# Altium PCB CirclePCBV2_3in.PcbDoc
Units mil, origin at the board's own origin, x right, y up, seen from the top; angles counter-clockwise.
Board outline 3370.9 x 3599.81 mil, 4 copper layers (Top Layer, GND Plane, 5V Plane, Bottom Layer), stack 38.58 mil thick; 9 components, 31 nets, 90 pads, 33 vias.
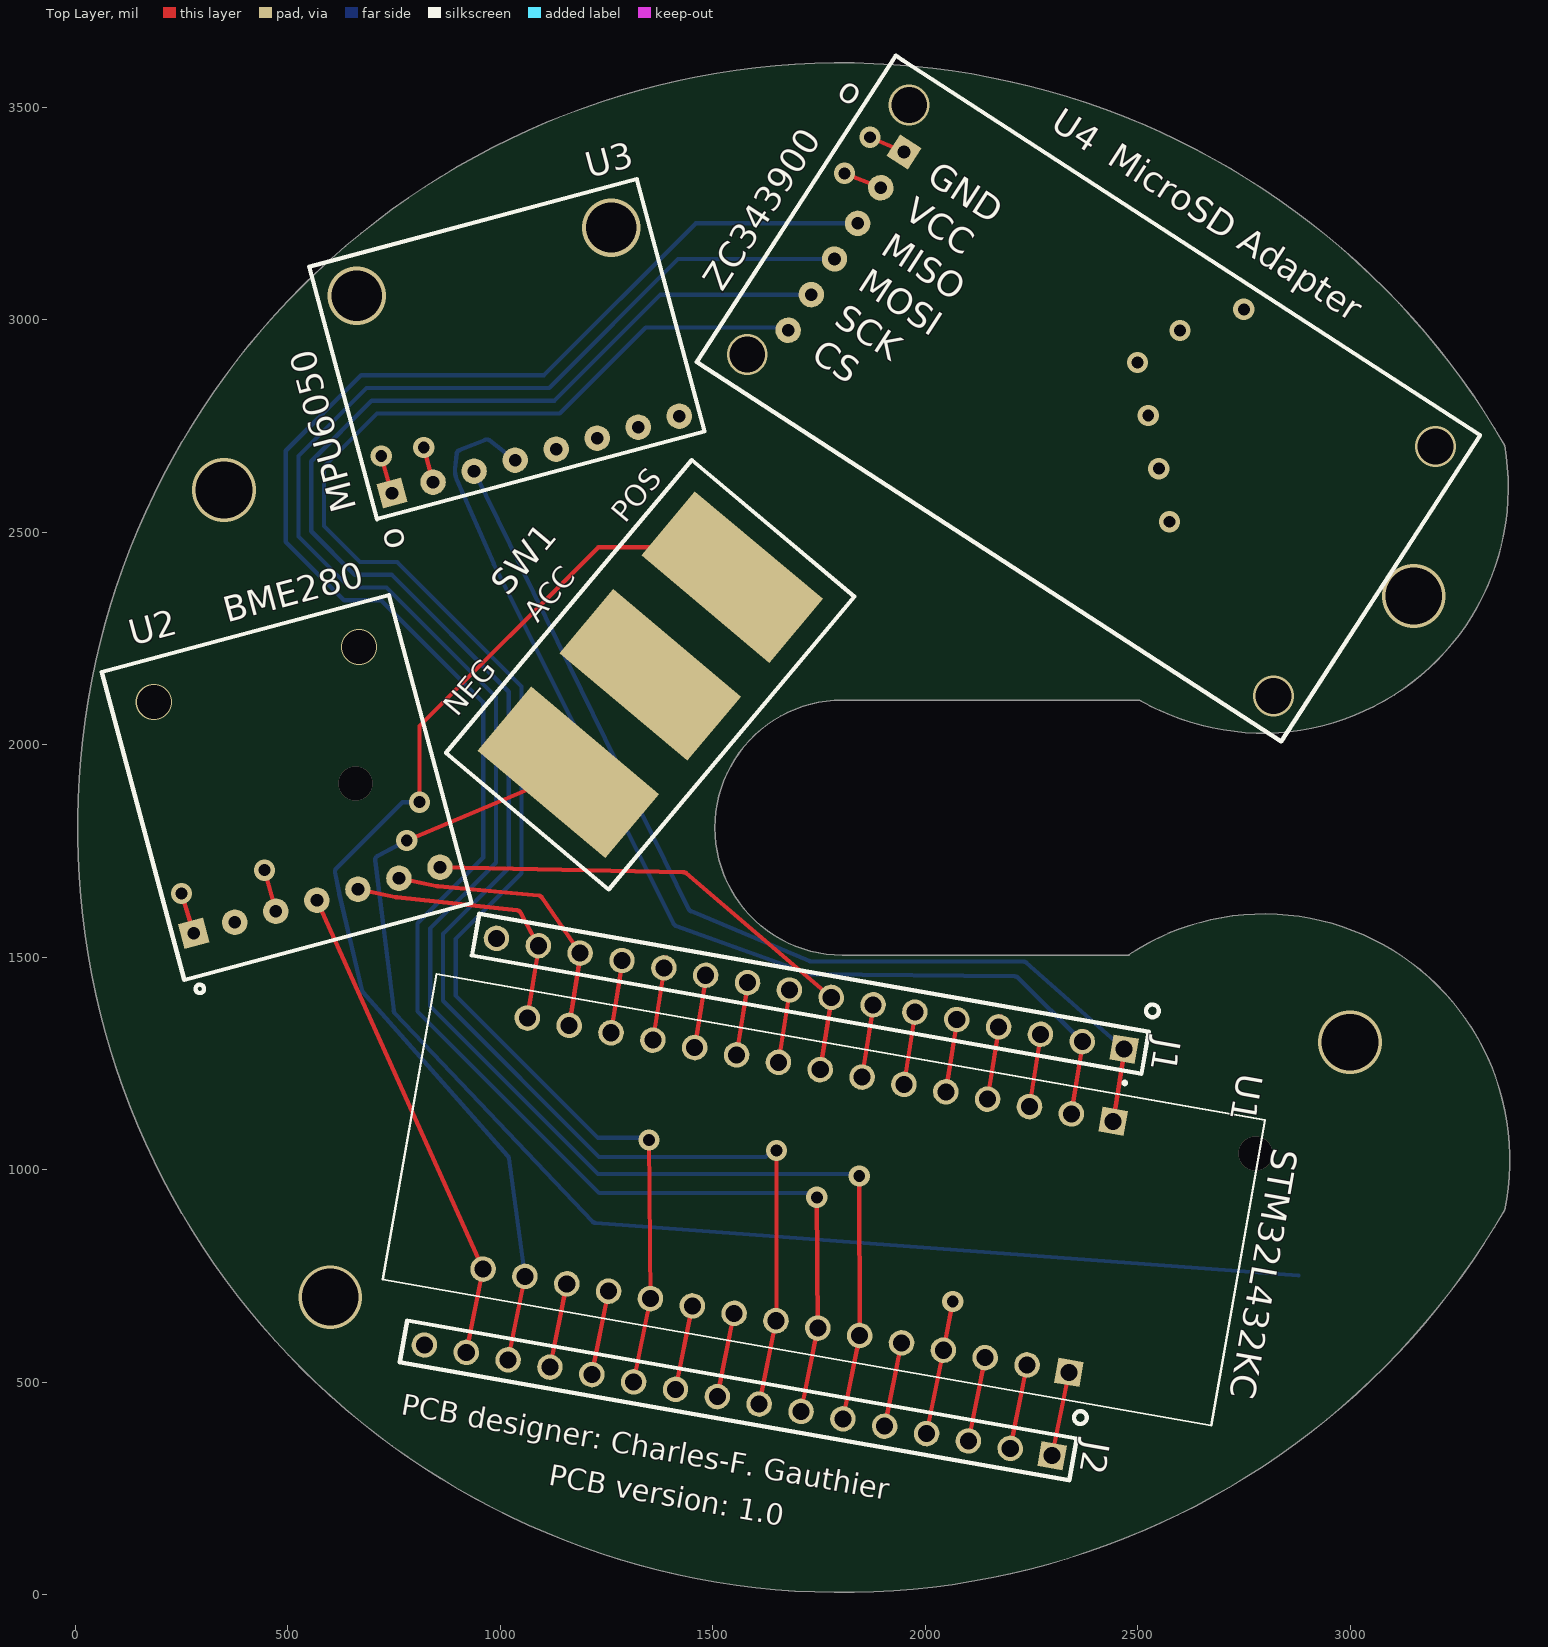
[diagram p0: Top Layer view]
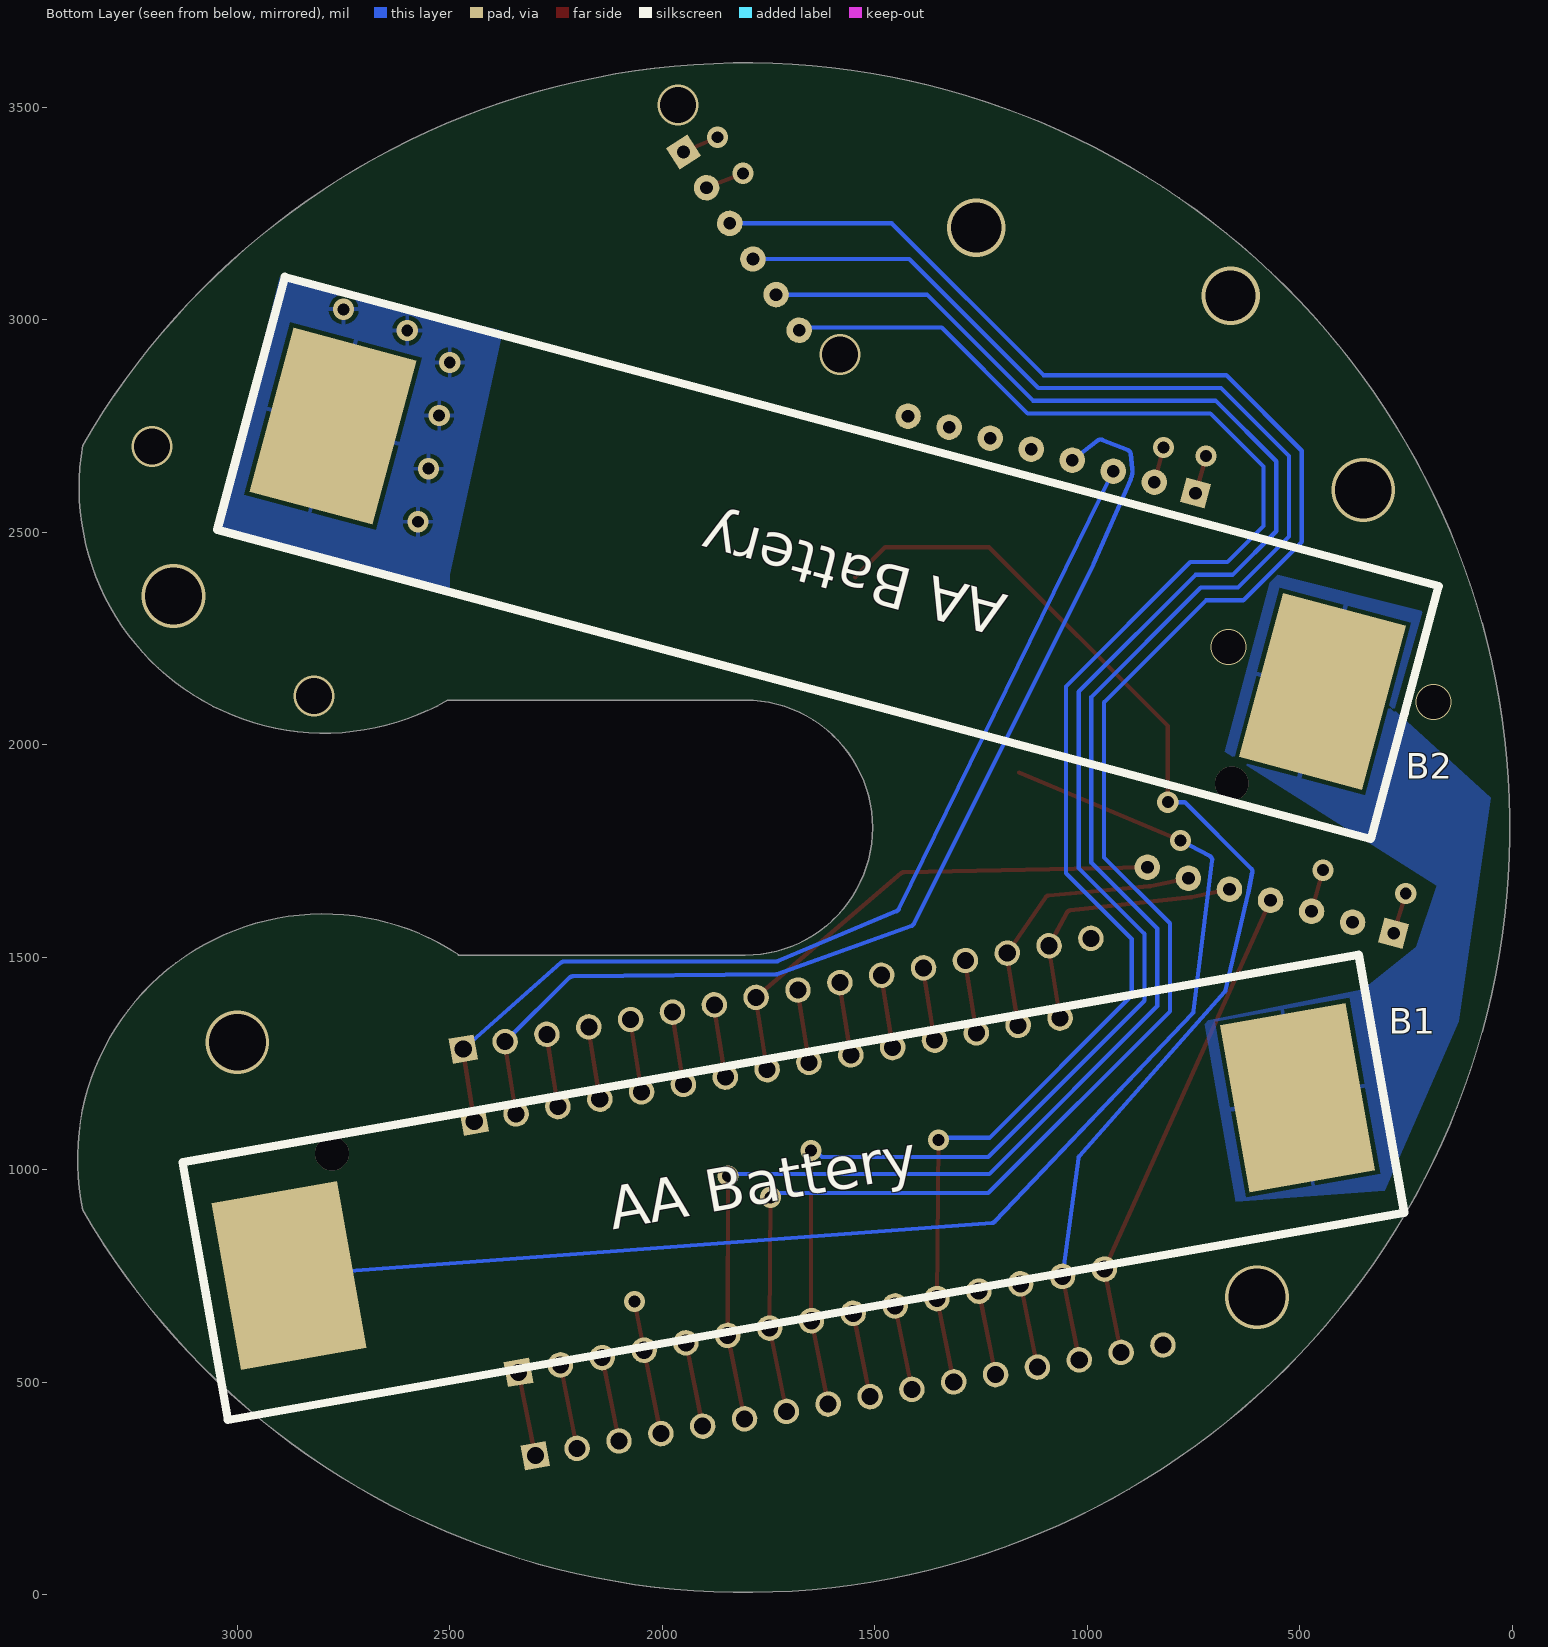
[diagram p1: Bottom Layer view, seen from below]
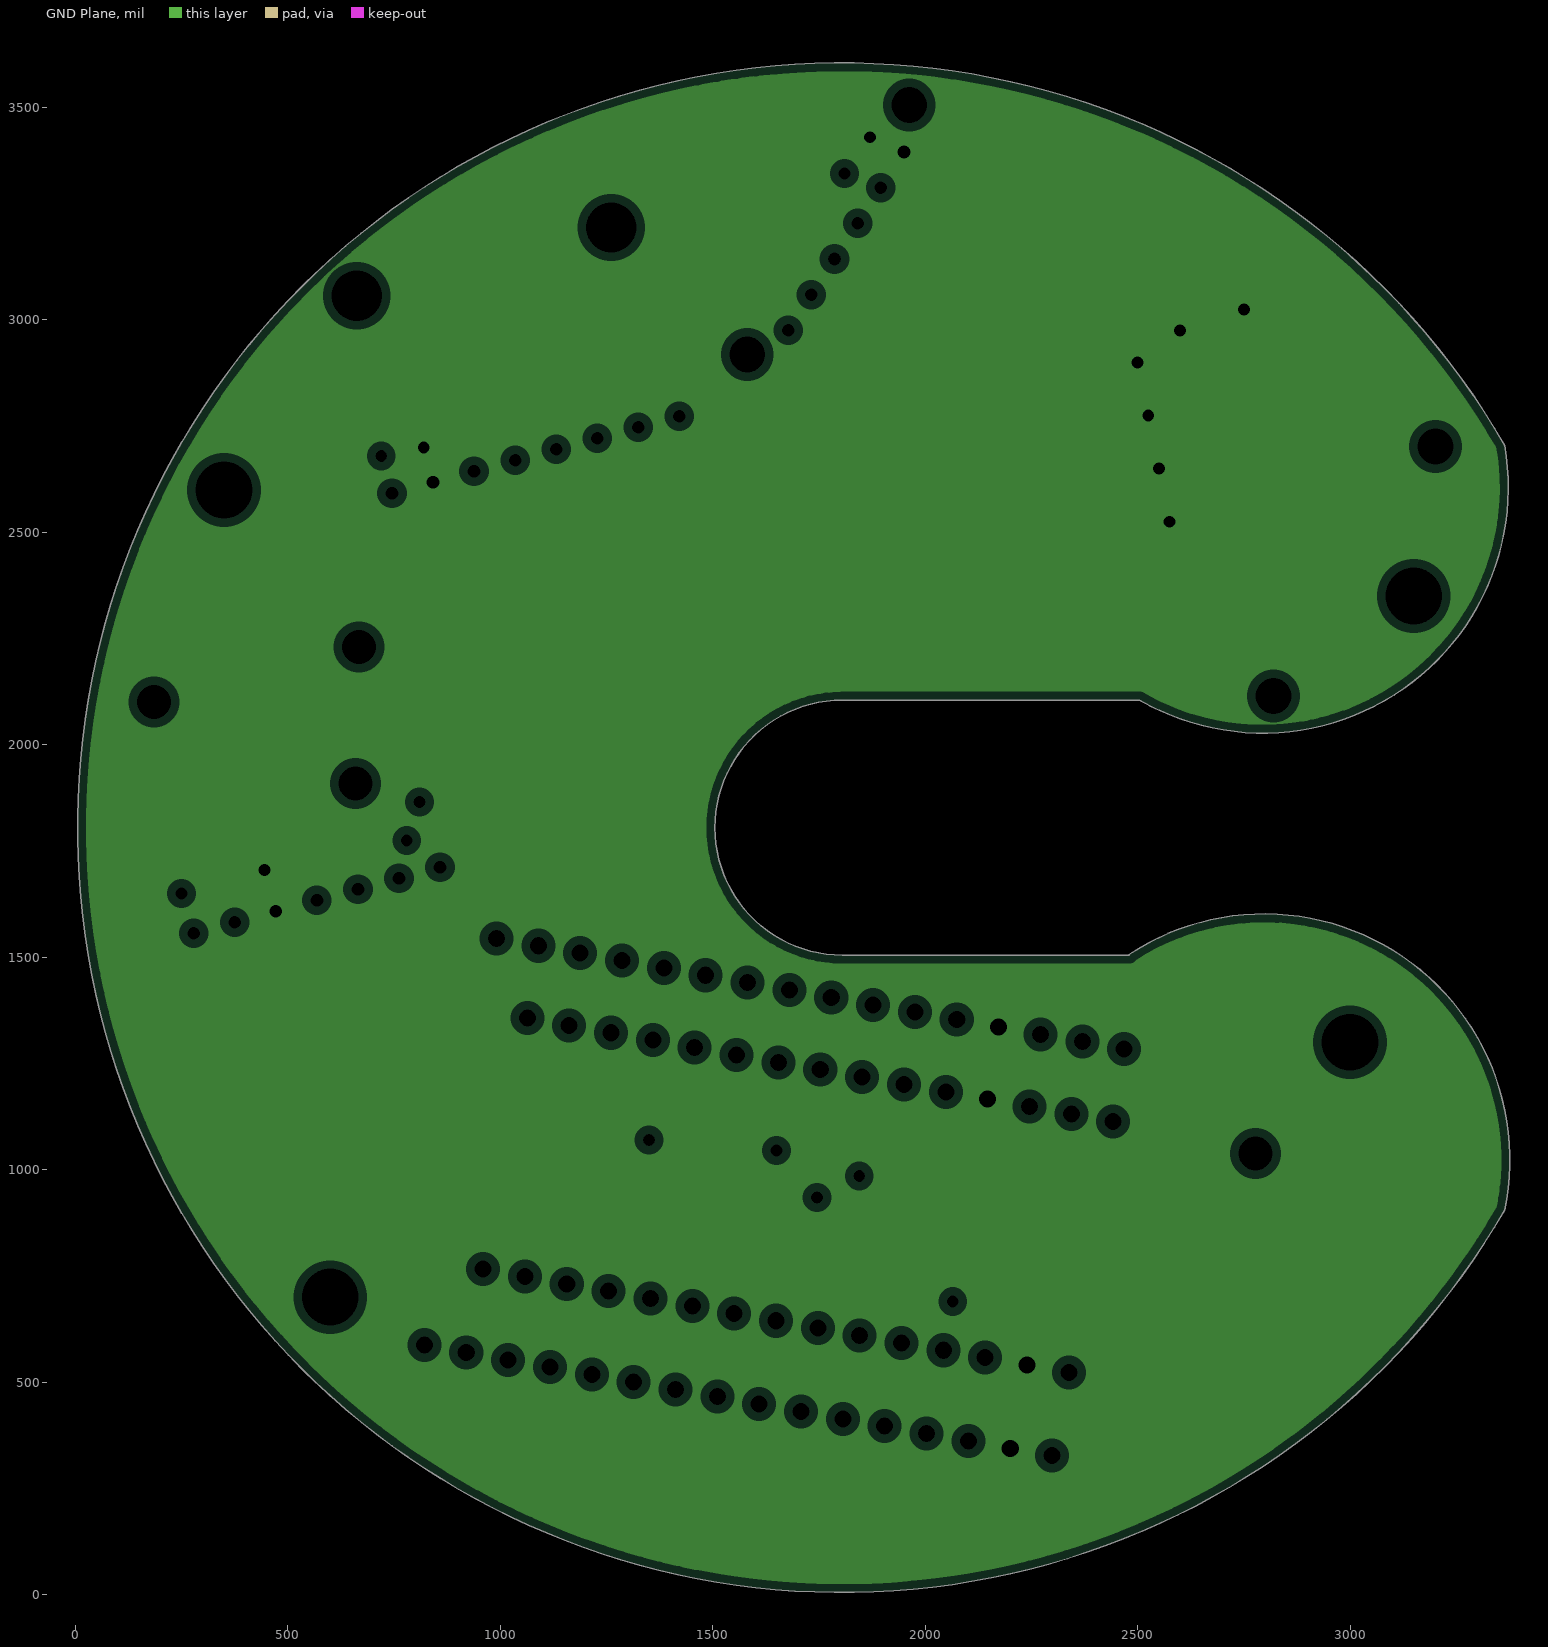
[diagram p2: GND Plane, clearances drawn from the general rule]
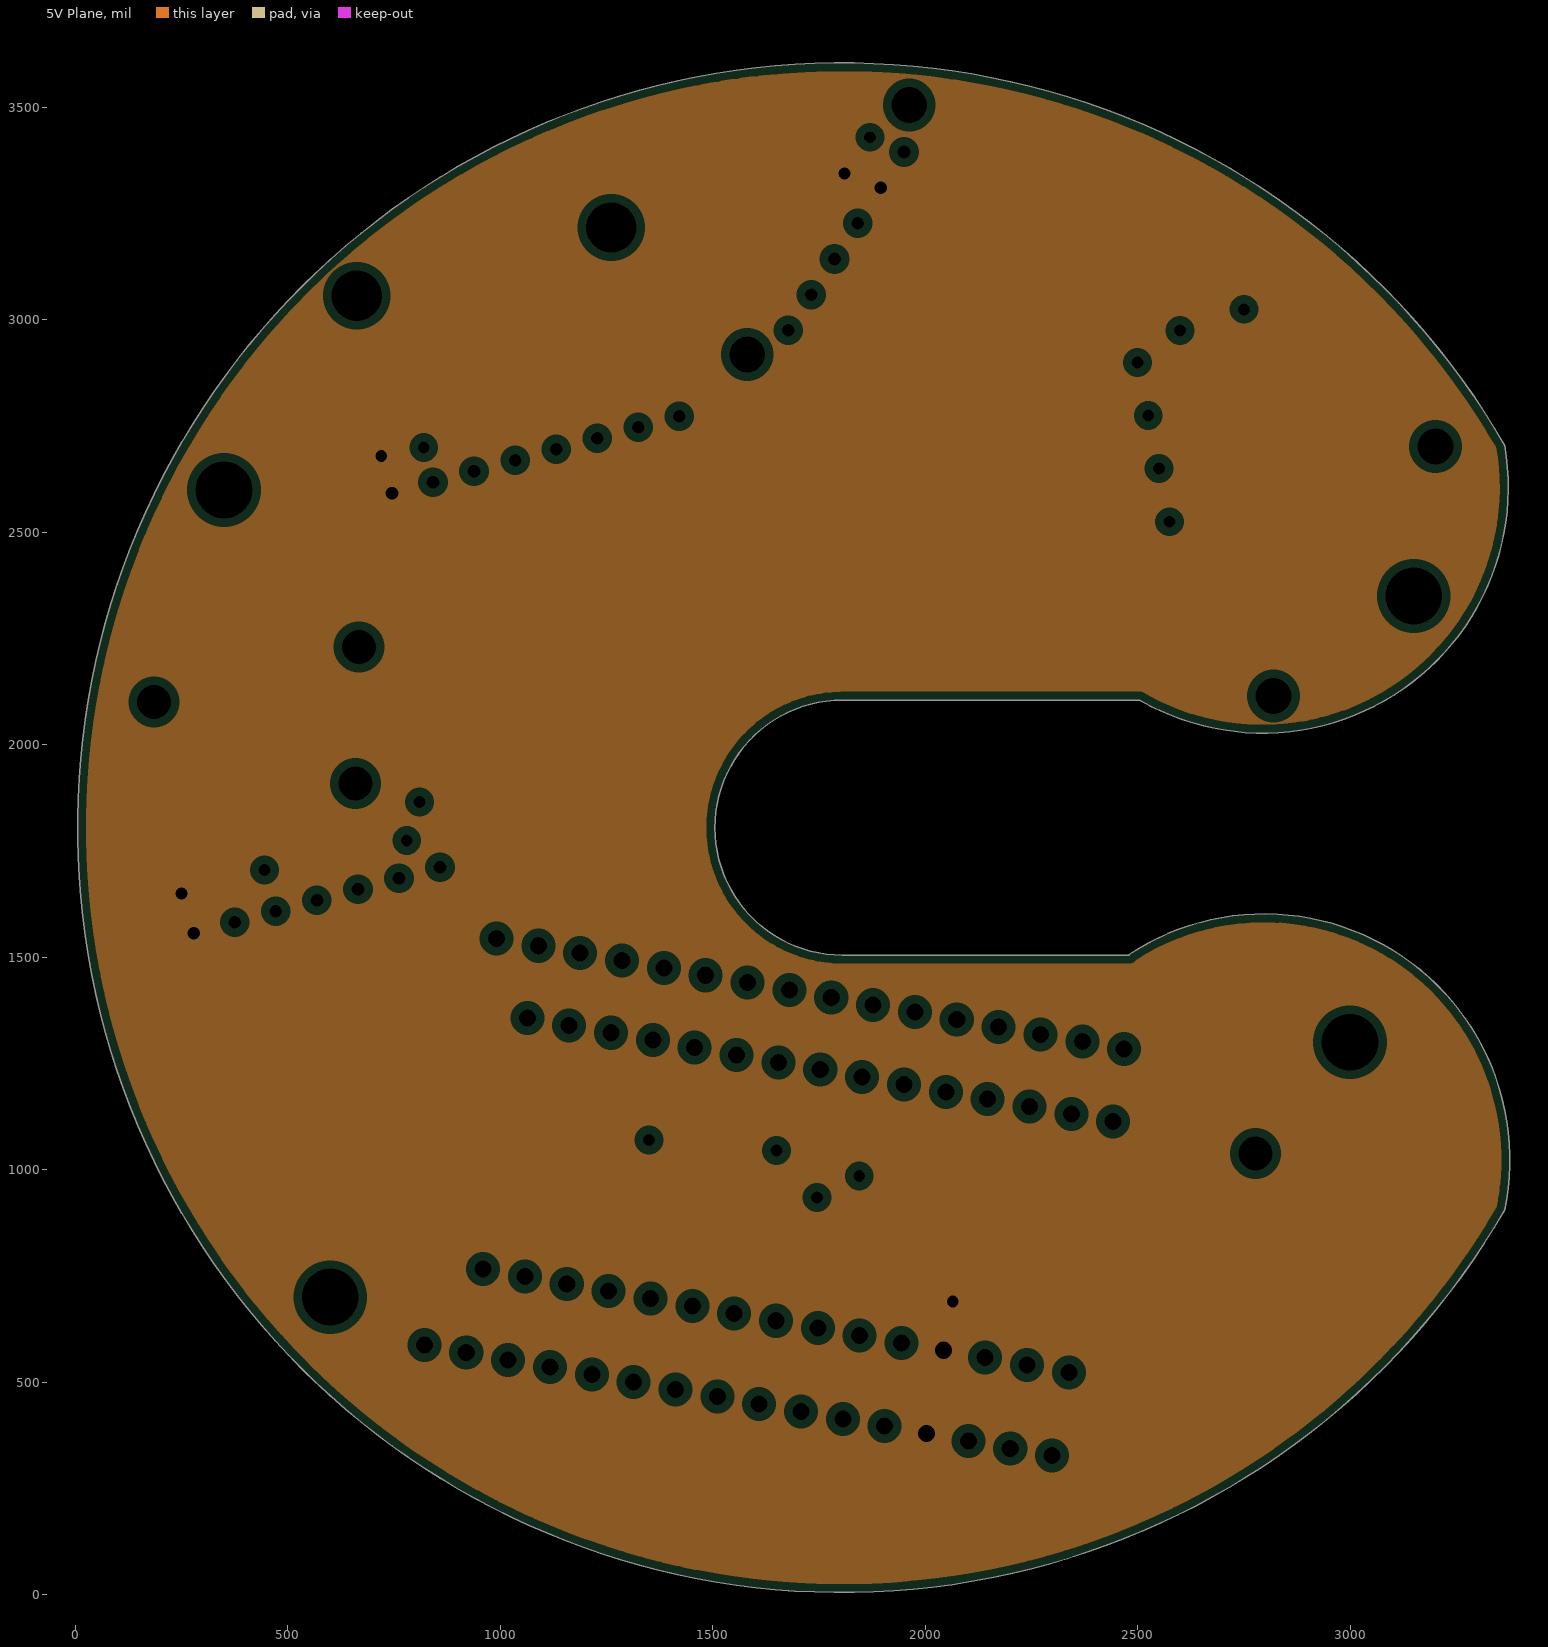
[diagram p3: 5V Plane, clearances drawn from the general rule]

## Layer stack, top to bottom
Top Solder: solder mask 0.4, Solder Resist, Dk 3.5
Top Layer: signal copper 1.4
Dielectric 2: prepreg 10.19, PP-006, Dk 4.1
GND Plane: plane copper 1.4, net GND
Dielectric 1: dielectric 12.6, FR-4, Dk 4.8
5V Plane: plane copper 1.4, net 5V
Dielectric 3: prepreg 10.19, PP-006, Dk 4.1
Bottom Layer: signal copper 1.4
Bottom Solder: solder mask 0.4, Solder Resist, Dk 3.5

## Board outline
3363.85,905 cw(c1805,1805) 3363.85,2705 cw(c2794.13,2605.82) 2505,2105 1805,2105 ccw(c1805,1805) 1805,1505 2480.49,1505 2479.51,1506.49 cw(c2797.88,1023.73)

## Design rules (kind name [scope] priority, off if disabled: settings)
Clearance [All] p1: gap=10 ignorepadtopadclearanceinfootprint=FALSE except(0: Arc-Hole Track-Hole SMDPad-Hole THPad-Hole Via-Hole Fill-Hole Poly-Hole Region-Hole Text-Hole)
HoleSize [All] p1: absolutevalues=TRUE maxlimit=150 minlimit=1 maxpercent=80.000 minpercent=20.000
PlaneClearance [All] p1: clearance=20
PlaneConnect [All] p1: planeconnectstyle=Relief reliefexpansion=20 reliefentries=4 reliefconductorwidth=10 reliefairgap=10
PolygonConnect [All] p1: connectstyle=Relief reliefconductorwidth=10 reliefentries=4 polygonreliefangle="90 Angle" airgapwidth=10
RoomDefinition STM32 [InComponentClass('STM32')] p1: confinementstyle=ConfineOut formatcopy=TRUE lockcomponents=FALSE outline 7280,6095 8515,6095 8515,8290 7280,8290
RoomDefinition Sensors [InComponentClass('Sensors')] p2: confinementstyle=ConfineOut formatcopy=TRUE lockcomponents=FALSE outline 7200,4740 8680,4740 8680,5765 7200,5765
RoomDefinition SD [InComponentClass('SD')] p3: confinementstyle=ConfineOut formatcopy=TRUE lockcomponents=FALSE outline 7170,2678.62 8300,2678.62 8300,4523.62 7170,4523.62
RoomDefinition Power [InComponentClass('Power')] p4: confinementstyle=ConfineOut formatcopy=TRUE lockcomponents=FALSE outline 7205,-395 9225,-395 9225,2550 7205,2550
RoutingVias [All] p1: holewidth=28 width=50 viastyle="Through Hole" minholewidth=28 minwidth=50 maxholewidth=28 maxwidth=50
SilkToSolderMaskClearance [IsPad] p1 off: minsilkscreentomaskgap=10 clearancetoexposedcopper=TRUE
SolderMaskExpansion [All] p1: expansion=4 istentingtop=FALSE
Width [All] p1: maxlimit=10 minlimit=10 preferedwidth=10
26 further rules are at their usual default settings.

## Classes and differential pairs
net class SD_SPI[3..0]: SD_SPI0 SD_SPI1 SD_SPI2 SD_SPI3
net class MPU6050_I2C[1..0]: MPU6050_I2C0 MPU6050_I2C1
net class BME280_SPI[3..0]: BME280_SPI0 BME280_SPI1 BME280_SPI2 BME280_SPI3
component class STM32: J1 J2 U1
component class Sensors: U2 U3
component class SD: U4
component class Power: B1 B2 SW1

## Components (designator, comment, footprint, x,y, rotation, side; value= is the part's Value field where it differs from the comment)
B1 "BatteryHolder_AA" BatteryHolder_AA 2878.85,750.99 r170 bottom
B2 "BatteryHolder_AA" BatteryHolder_AA 446.15,2125.99 r15 bottom
J1 "16pin-MF-Connector" 16pin-MF-Connector 2468.29,1283.99 r260 top
J2 "16pin-MF-Connector" 16pin-MF-Connector 2298.73,326.89 r260 top
SW1 "RR3130Switch" RR3130Switch 1545.67,2394.63 r230 top
U1 "STM32L432KC" STM32L432KC 2811.61,1125 r260 top
U2 "BME280" BME280 278.63,1556.47 r15 top
U3 "MPU6050" MPU6050 745.22,2592.35 r105 top
U4 "ZC343900" ZC343900 1950,3395 r327 top

## Footprints (in the part's own frame and the unit in brackets; to place one, negate y for a bottom-side part, rotate by r counter-clockwise, add the part's x,y. Pads: shape width x height; smd on the part's side, far side on the other; paste and mask are expansions set on the pad)
16pin-MF-Connector [mil]
  rect 60x60 hole 40.16: 1(0,0)
  round 60 hole 40.16: 2(0,-100) 3(0,-200) 4(0,-300) 5(0,-400) 6(0,-500) 7(0,-600) 8(0,-700) 9(0,-800) 10(0,-900) 11(0,-1000) 12(0,-1100) 13(0,-1200) 14(0,-1300) 15(0,-1400) 16(0,-1500)
  silkscreen extent -115,-1550 50,65
BatteryHolder_AA [mil]
  rect 300x400 smd: 1(0,0) 2(2411,0)
  silkscreen extent -200,-310 2611,306
BME280 [mil]
  rect 60x60 hole 30: 1(0,0)
  round 60 hole 30: 2(100,0) 3(200,0) 4(300,0) 5(400,0) 6(500,0) 7(600,0)
  silkscreen extent -50,-140 650,650
MPU6050 [mil]
  rect 60x60 hole 30: 1(0,0)
  round 60 hole 30: 2(0,-100) 3(0,-200) 4(0,-300) 5(0,-400) 6(0,-500) 7(0,-600) 8(0,-700)
  silkscreen extent -50,-748 565,50
RR3130Switch [mm] "SWITCH ROCKER SPST 10A 125V"
  rect 5x10 smd: 1(0,0) 2(7.62,0) 3(15.24,0)
  silkscreen extent -3.81,-6.35 19.05,6.35
STM32L432KC [mm]
  rect 1.53x1.53 hole 1.02: CN3_1(1.905,-9.185) CN4_1(17.145,-9.185)
  round 1.53 hole 1.02: CN3_2(1.905,-11.725) CN3_3(1.905,-14.265) CN3_4(1.905,-16.805) CN3_5(1.905,-19.345) CN3_6(1.905,-21.885) CN3_7(1.905,-24.425) CN3_8(1.905,-26.965) CN3_9(1.905,-29.505) CN3_10(1.905,-32.045) CN3_11(1.905,-34.585) CN3_12(1.905,-37.125) CN3_13(1.905,-39.665) CN3_14(1.905,-42.205) CN3_15(1.905,-44.745) CN4_2(17.145,-11.725) CN4_3(17.145,-14.265) CN4_4(17.145,-16.805) CN4_5(17.145,-19.345) CN4_6(17.145,-21.885) CN4_7(17.145,-24.425) CN4_8(17.145,-26.965) CN4_9(17.145,-29.505) CN4_10(17.145,-32.045) CN4_11(17.145,-34.585) CN4_12(17.145,-37.125) CN4_13(17.145,-39.665) CN4_14(17.145,-42.205) CN4_15(17.145,-44.745)
  silkscreen extent -0.57,-50.55 18.8,-0.25
ZC343900 [mil] "MicroSD Adapter"
  rect 60x60 hole 30: 1(0,0)
  round 60 hole 30: 2(0,-100) 3(0,-200) 4(0,-300) 5(0,-400) 6(0,-500)
  silkscreen extent -140,-680 1500,180

## Part data
B1 B2: "Keystone Electronics 1088"
SW1: "SWITCH ROCKER SPST 10A 125V"
U4: "MicroSD Adapter"

## Via types
v1: diameter 50, hole 27.99, Top Layer to Bottom Layer, 19 vias
v2: diameter 150, hole 133.86, Top Layer to Bottom Layer, 4 vias
v3: diameter 96.46, hole 84.65, Top Layer to Bottom Layer, 4 vias
v4: diameter 80, hole 80, Top Layer to Bottom Layer, 2 vias
v5: diameter 137.8, hole 118.11, Top Layer to Bottom Layer, 2 vias
v6: diameter 85, hole 80, Top Layer to Bottom Layer, 2 vias

## Nets (pads, with @x,y where several pads share a name; then routed paths per layer and width w, separated by ;. In a path a pad name is that pad's centre, name@x,y a point inside that pad or via, vN(x,y) a via of type N, cw(c..) or ccw(c..) an arc to the next point about the centre after c; other vN are vias at no path point)
3V3: J2.14 SW1.1 U1.CN4_14 | length 2680.2
  Top Layer w10: v1(810,1865) 810,2044.14 1230.86,2465 1475.3,2465 SW1.1 ; J2.14 U1.CN4_14
  Bottom Layer w10: 674.42,1422.46 621.19,1649.74 cw(c665,1660) 620.87,1651.21 611.17,1699.88 cw(c620.98,1701.84) 613.91,1708.91 770,1865 v1(810,1865) ; 674.44,1422.41 ccw(c684.16,1424.74) 676.67,1418.11 1017.99,1032.28 ; 1018.01,1032.25 cw(c1010.5,1025.65) 1020.41,1026.95 U1.CN4_14
5V: J2.4 U1.CN4_4 U2.1 U3.1 U4.2 | length 595.4
  Top Layer w10: v1(250,1650) U2.1 ; v1@720.14,2676.9 744.32,2592.85 U3.1 ; v1(1810,3345) U4.2 ; J2.4 U1.CN4_4 v1(2065,690)
  other v1: 720,2680
BME280_SPI0: J2.15 U1.CN4_15 U2.4 | length 1152.1
  Top Layer w10: U2.4 U1.CN4_15 J2.15
BME280_SPI1: J1.15 U1.CN3_15 U2.5 | length 673.1
  Top Layer w10: U2.5 752.43,1641.82 ccw(c761.59,1685.88) 756.76,1641.14 1039.76,1610.57 ; 1039.79,1610.56 cw(c1038.69,1600.62) 1047.52,1605.32 J1.15 ; U1.CN3_15 1090.93,1526.87 J1.15@1094.75,1550.74
BME280_SPI2: J1.14 U1.CN3_14 U2.6 | length 696.1
  Top Layer w10: U2.6 849.02,1667.71 ccw(c858.18,1711.76) 854.1,1666.95 1090.33,1645.43 ; 1090.34,1645.42 cw(c1089.42,1635.47) 1097.67,1641.11 J1.14 ; U1.CN3_14 1189.41,1509.51 J1.14@1193.23,1533.38
BME280_SPI3: J1.8 U1.CN3_8 U2.7 | length 1225.6
  Top Layer w10: U2.7 1431.42,1700.07 ; 1431.45,1700.07 cw(c1431.22,1690.07) 1437.75,1697.65 J1.8 ; U1.CN3_8 1780.29,1405.32 J1.8@1784.12,1429.19
CN3_3: J1.3 U1.CN3_3 | length 196.2
  Top Layer w10: U1.CN3_3 J1.3@2276.52,1342.37
CN3_5: J1.5 U1.CN3_5 | length 196.2
  Top Layer w10: U1.CN3_5 J1.5@2079.56,1377.09
CN3_6: J1.6 U1.CN3_6 | length 196.2
  Top Layer w10: U1.CN3_6 J1.6@1981.08,1394.46
CN3_7: J1.7 U1.CN3_7 | length 196.2
  Top Layer w10: U1.CN3_7 J1.7@1882.6,1411.82
CN3_9: J1.9 U1.CN3_9 | length 196.2
  Top Layer w10: U1.CN3_9 J1.9@1685.63,1446.55
CN3_10: J1.10 U1.CN3_10 | length 196.2
  Top Layer w10: U1.CN3_10 J1.10@1587.15,1463.92
CN3_11: J1.11 U1.CN3_11 | length 196.2
  Top Layer w10: U1.CN3_11 J1.11@1488.67,1481.28
CN3_12: J1.12 U1.CN3_12 | length 196.2
  Top Layer w10: U1.CN3_12 J1.12@1390.19,1498.65
CN3_13: J1.13 U1.CN3_13 | length 196.2
  Top Layer w10: U1.CN3_13 J1.13@1291.71,1516.01
CN4_1: J2.1 U1.CN4_1 | length 200.1
  Top Layer w10: J2.1 U1.CN4_1
CN4_3: J2.3 U1.CN4_3 | length 200.1
  Top Layer w10: J2.3 U1.CN4_3
CN4_5: J2.5 U1.CN4_5 | length 200.1
  Top Layer w10: J2.5 U1.CN4_5
CN4_9: J2.9 U1.CN4_9 | length 200.1
  Top Layer w10: J2.9 U1.CN4_9
CN4_10: J2.10 U1.CN4_10 | length 200.1
  Top Layer w10: J2.10 U1.CN4_10
CN4_12: J2.12 U1.CN4_12 | length 200.1
  Top Layer w10: J2.12 U1.CN4_12
CN4_13: J2.13 U1.CN4_13 | length 200.1
  Top Layer w10: J2.13 U1.CN4_13
GND: B2.2 J1.4 J2.2 U1.CN3_4 U1.CN4_2 U2.3 U3.2 U4.1 | length 668.6
  Top Layer w10: v1(445,1705) U2.3 ; v1(820,2700) U3.2 ; v1(1870,3430) U4.1 ; U1.CN3_4 J1.4@2178.04,1359.73 ; J2.2 U1.CN4_2
  other v1: 2575,2525 2550,2650 2525,2775 2500,2900 2600,2975 2750,3025
MPU6050_I2C0: J1.1 U1.CN3_1 U3.3 | length 2472.5
  Top Layer w10: U1.CN3_1 2469.66,1283.77 J1.1@2473.48,1307.64
  Bottom Layer w10: U3.3 1443.37,1613.34 ccw(c1452.33,1617.76) 1448.45,1608.55 1728.14,1490.78 ccw(c1732.02,1500) 1732.02,1490 2231.17,1490 cw(c2231.22,1480) 2237.83,1487.5 J1.1
MPU6050_I2C1: J1.2 U1.CN3_2 U3.4 | length 2631.3
  Top Layer w10: U1.CN3_2 2371.18,1301.13 J1.2@2375,1325
  Bottom Layer w10: 974.52,2716.52 U3.4 ; 974.5,2716.54 ccw(c968.42,2708.6) 964.69,2717.88 903.8,2693.52 ccw(c907.52,2684.24) 897.58,2685.31 893.67,2648.93 ccw(c938.41,2644.12) 897.17,2626.11 984.9,2425.24 ; 984.91,2425.2 ccw(c994.06,2429.24) 985.12,2424.77 1408.21,1578.58 ; 1408.22,1578.55 ccw(c1417.15,1583.06) 1413.77,1573.64 1728.41,1460.57 ; 1728.44,1460.56 ccw(c1731.79,1469.98) 1731.69,1459.98 2210.94,1455.04 cw(c2210.84,1445.04) 2217.9,1452.12 J1.2
NetB1_1: B1.1 SW1.3 | length 3208.9
  Top Layer w10: v1(780,1775) SW1.3
  Bottom Layer w10: v1(780,1775) 711.09,1738.25 ccw(c715.77,1729.41) 705.84,1728.18 749.59,1373.29 ccw(c759.52,1374.5) 752.26,1367.62 1217.32,877.82 ccw(c1224.59,884.68) 1223.85,874.71 B1.1
NetB1_2: B1.2 B2.1
SD_SPI0: J2.11 U1.CN4_11 U4.6 | length 3953.2
  Top Layer w10: J2.11 U1.CN4_11 v1(1350,1070)
  Bottom Layer w10: v1(1350,1070) 1345,1075 1230,1075 895,1410 895,1542.72 1050,1697.72 1050,2137.28 757.28,2430 670,2430 585,2515 585,2655 710,2780 1140,2780 1342.26,2982.26 1671.09,2982.26 U4.6
SD_SPI1: J2.8 U1.CN4_8 U4.5 | length 4461.8
  Top Layer w10: J2.8 U1.CN4_8 1650,645.69 v1(1650,1045)
  Bottom Layer w10: v1(1650,1045) 1639.18,1045 1624.18,1030 1232.57,1030 865,1397.57 865,1555.15 1020,1710.15 1020,2124.85 744.85,2400 657.57,2400 555,2502.57 555,2667.43 697.57,2810 1127.57,2810 1377.11,3059.53 U4.5
SD_SPI2: J2.7 U1.CN4_7 U4.3 | length 4815.2
  Top Layer w10: J2.7 U1.CN4_7 v1(1745,935)
  Bottom Layer w10: v1@1740,945 1232.72,945 805,1372.72 805,1580 960,1735 960,2100 720,2340 632.72,2340 495,2477.72 495,2692.28 672.72,2870 1102.72,2870 1459.99,3227.27 U4.3
SD_SPI3: J2.6 U1.CN4_6 U4.4 | length 4800.2
  Top Layer w10: J2.6 U1.CN4_6 v1(1845,985)
  Bottom Layer w10: U4.4 1418.55,3143.4 1115.15,2840 685.15,2840 525,2679.85 525,2490.15 645.15,2370 732.43,2370 990,2112.43 990,1722.57 835,1567.57 835,1385.15 1230.15,990 v1@1840,990
pads on no net: J1.16 J2.16 SW1.2 U2.2 U3.5 U3.6 U3.7 U3.8
copper on no net:
  other v2: 600,700 3000,1300 3150,2350 350,2600
  other v3: 2819.48,2114.94 3200.73,2702.01 1581.28,2919.03 1962.53,3506.1
  other v4: 2777.14,1038.01 659.63,1908.84
  other v5: 662.21,3056.69 1261.09,3217.16
  other v6: 184.57,2100.67 667.54,2230.08

## Polygon pours and split planes (outlines as drawn)
GND on Bottom Layer "GND_L04_P001" (solid, pour order 1): 2500,2400 2375,2975 2900,3100 3050,2500 2500,2350
NetB1_2 on Bottom Layer "NETB1_2_L04_P000" (solid, pour order 0): 325,2125 50,1875 125,1350 300,950 650,925 725,1350 350,1425 225,1525 177.17,1668.48 676.05,1983.56 564.06,2403.52 210,2315 277.78,2077.78
GND on GND Plane (split plane): 475 vertices, not listed, extent 25,25 3356.16,3584.99
5V on 5V Plane (split plane): 475 vertices, not listed, extent 25,25 3356.16,3584.99

## Silkscreen, mask and mechanical layers (free items; w line width, h text height)
Top Overlay:
  text "PCB designer: Charles-F. Gauthier" at 764.48,424.52 h50 r350
  text "PCB version: 1.0" at 1111.58,258.11 h50 r350
Mechanical 1:
  lines w10: 1805,1505 cw(c1805,1805) 1805,2105 2505,2105 ccw(c2794.13,2605.82) 3363.85,2705 ccw(c1805,1805) 3363.85,905 ccw(c2797.88,1023.73) 2479.51,1506.49 ; 1810,1505 2480.49,1505

## Text inside footprints (layer, text, board x,y; h text height)
B1: Bottom Overlay "AA Battery" at 2115.91,858.42 h100 r350
B2: Bottom Overlay "AA Battery" at 1183.01,2351.05 h100 r195
SW1: Top Overlay "ACC" at 1088.1,2284.46 h50 r50; Top Overlay "NEG" at 898.77,2064.09 h50 r50; Top Overlay "POS" at 1293.77,2519.09 h50 r50
U3: Top Overlay "o" at 778.87,2466.78 h60 r105
U4: Top Overlay "MicroSD Adapter" at 2424.72,3369.71 h60 r327; Top Overlay "GND" at 2000.75,3326.27 h60 r327; Top Overlay "VCC" at 1946.29,3242.4 h60 r327; Top Overlay "MISO" at 1891.83,3158.53 h60 r327; Top Overlay "MOSI" at 1837.36,3074.67 h60 r327; Top Overlay "SCK" at 1782.9,2990.8 h60 r327; Top Overlay "CS" at 1728.43,2906.93 h60 r327; Top Overlay "o" at 1788.83,3527.94 h60 r327